# Altium PCB disp7segTester.PcbDoc
Units mil, origin at the board's own origin, x right, y up, seen from the top; angles counter-clockwise.
Board outline 5287.5 x 4575 mil, 2 copper layers (Top Layer, Bottom Layer), stack 65.792 mil thick; 116 components, 181 nets, 477 pads, 0 vias.
Unrouted connection lines stored in the file: 243.
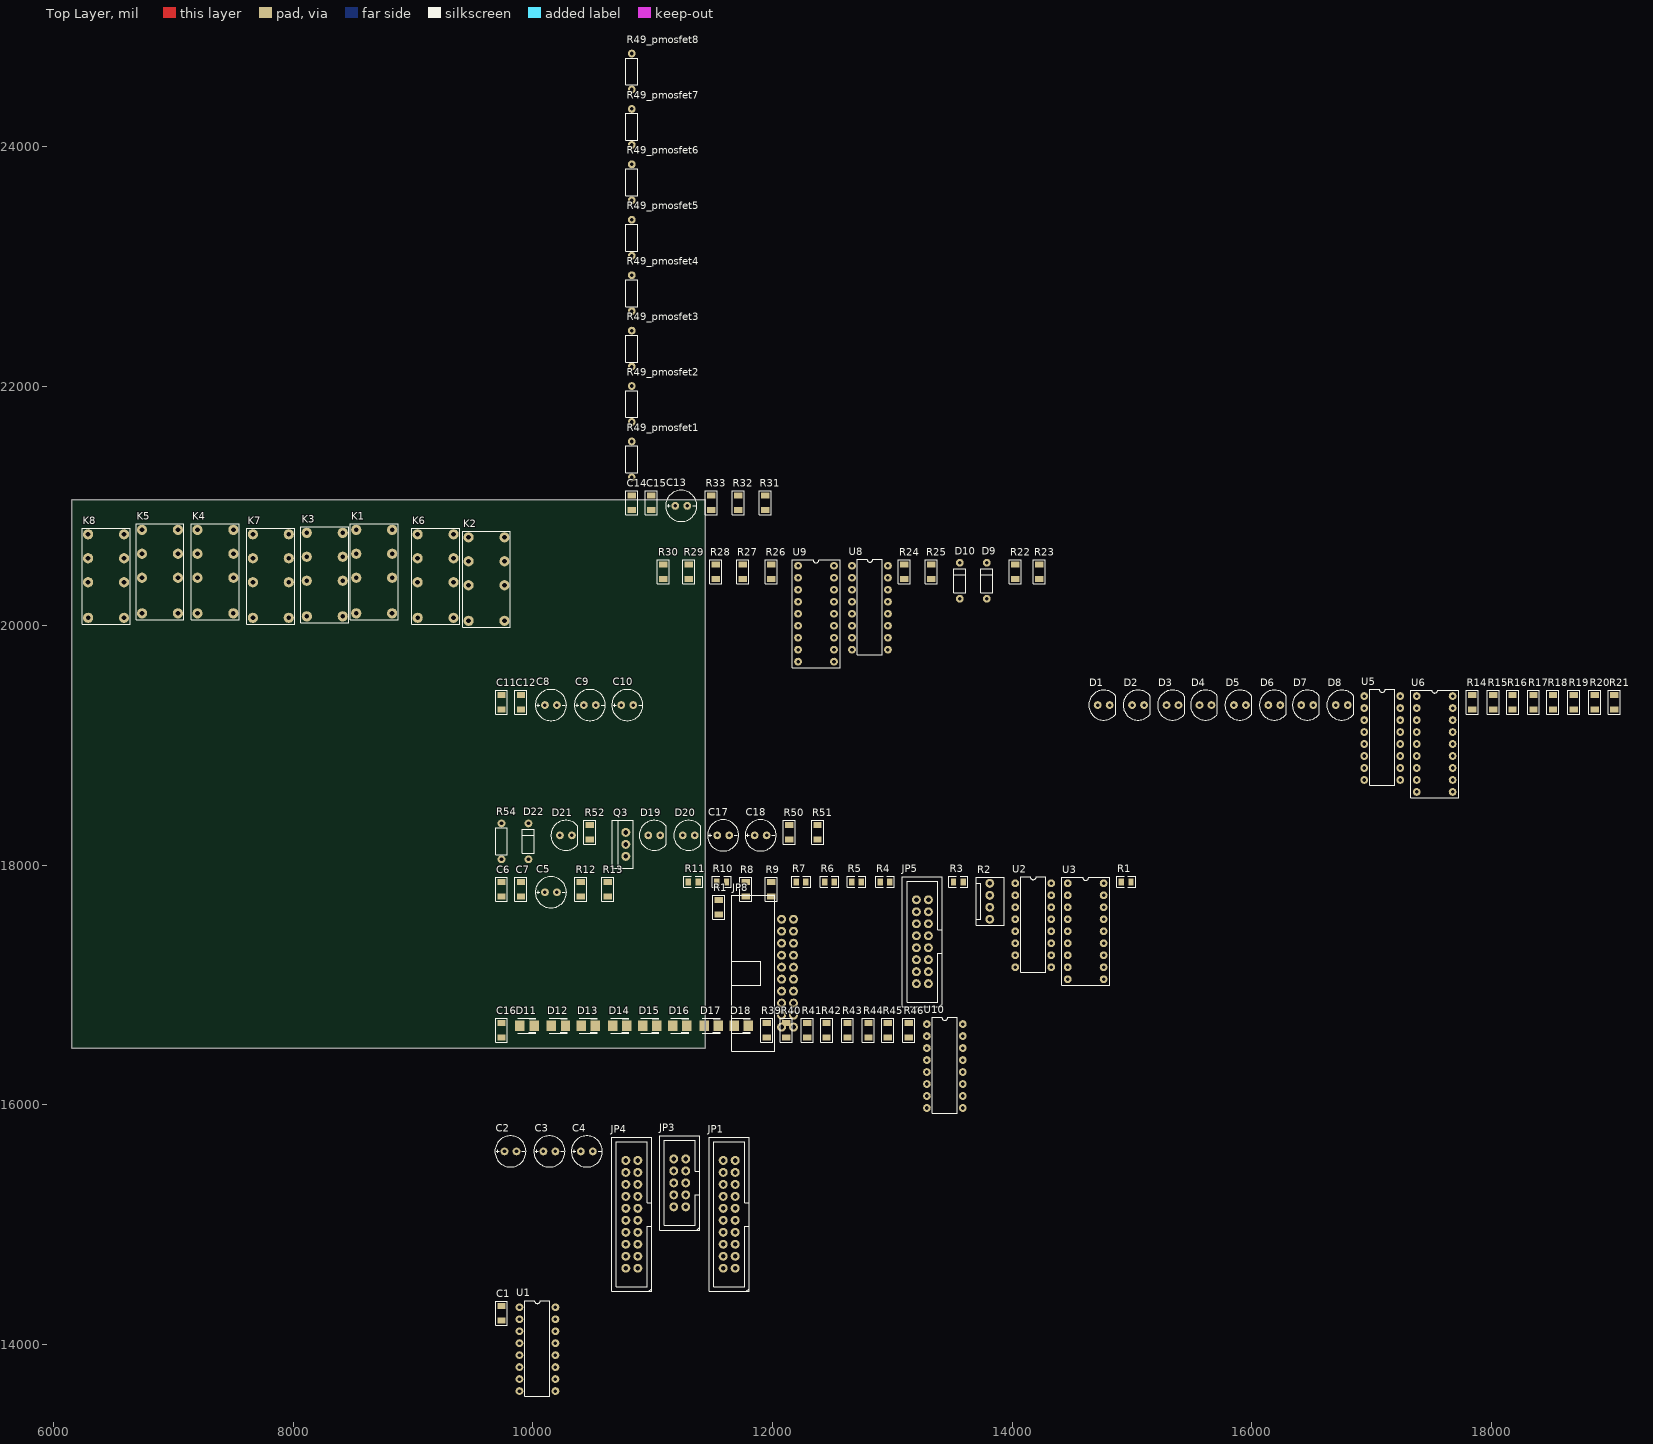
[diagram p0: Top Layer view]
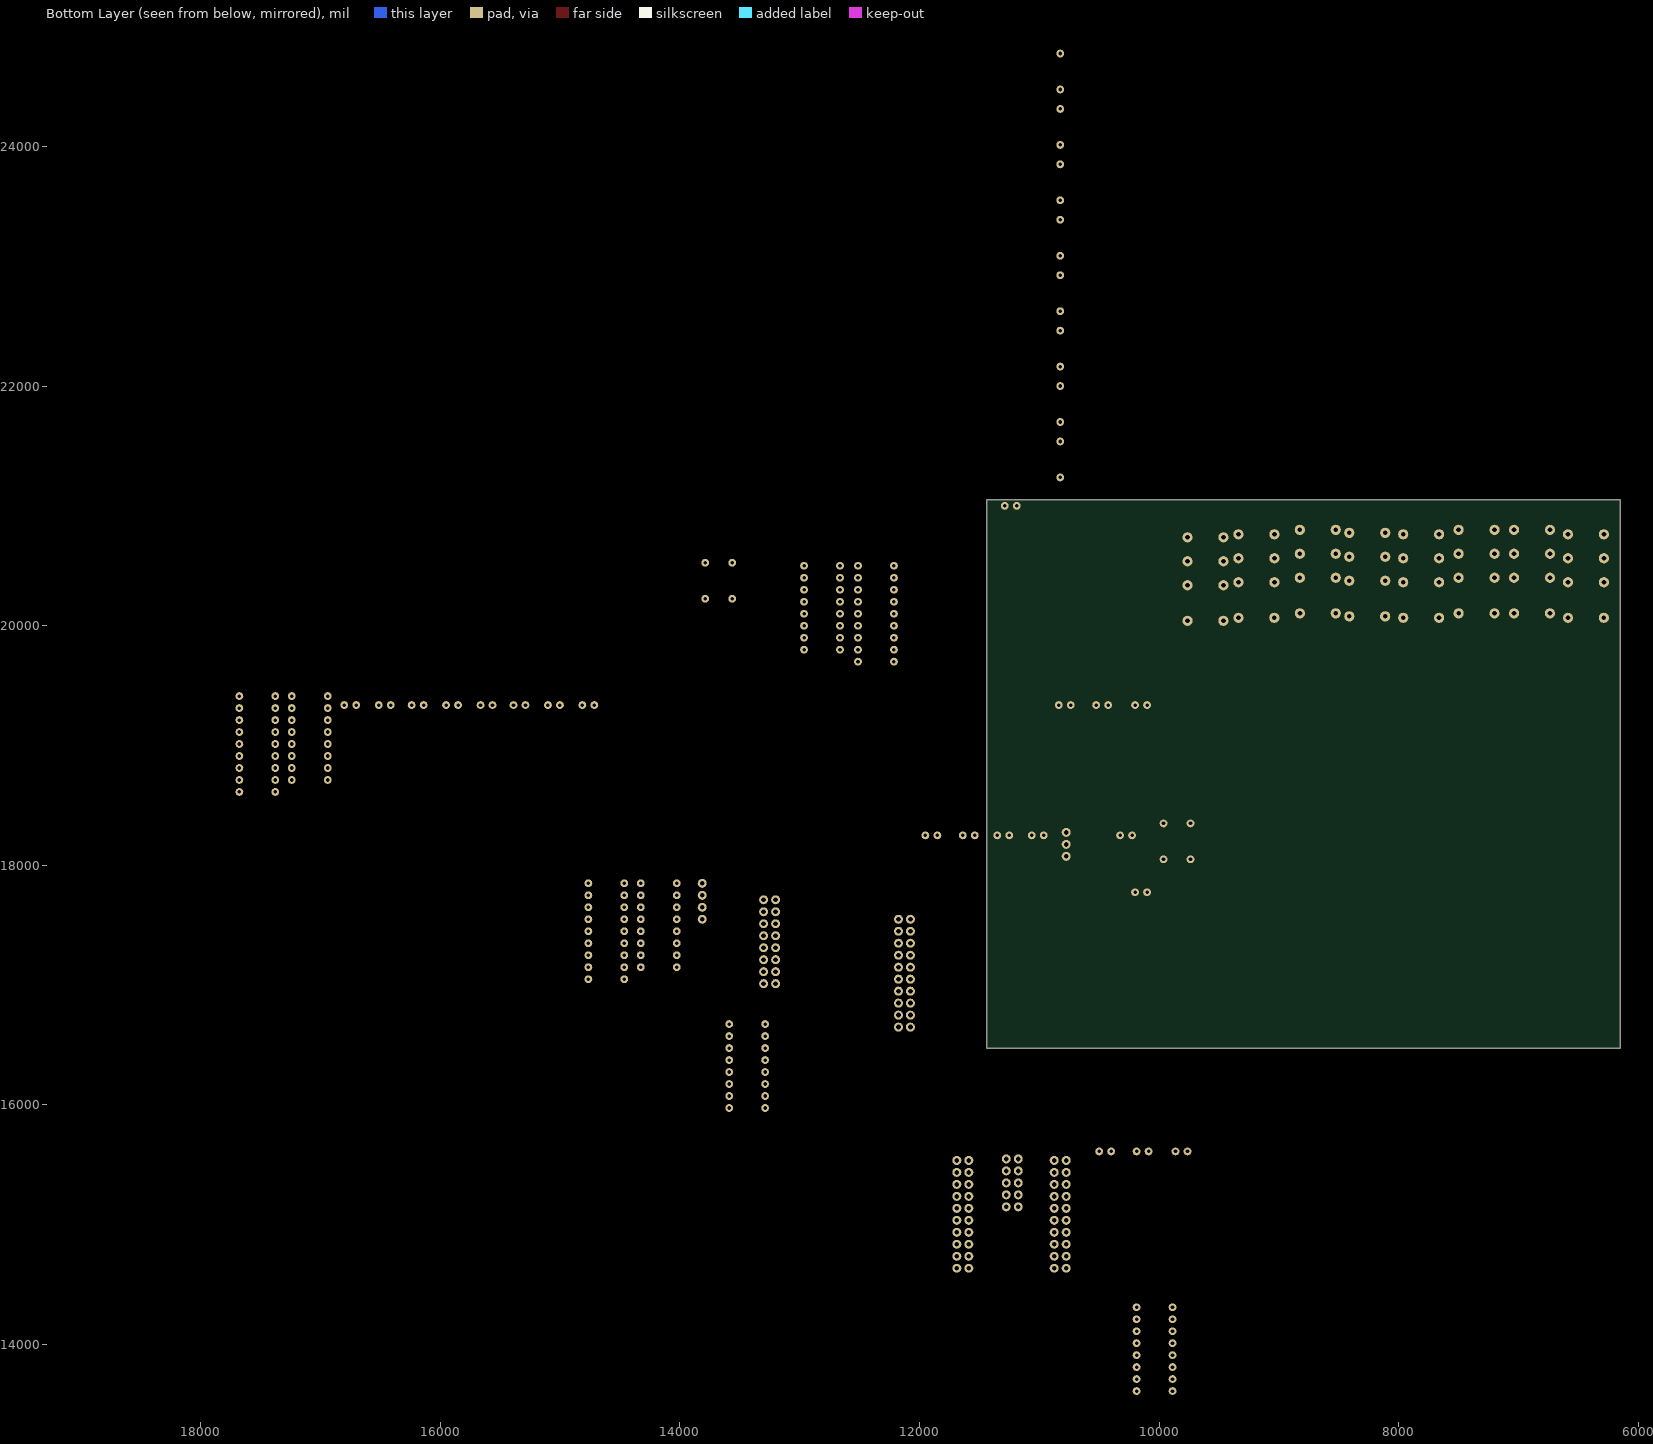
[diagram p1: Bottom Layer view, seen from below]

## Layer stack, top to bottom
Top Layer: signal copper 1.4
Dielectric: core 62.9921, FR-4, Dk 4.8
Bottom Layer: signal copper 1.4

## Board outline
6150,16475 11437.5,16475 11437.5,21050 6150,21050

## Design rules (kind name [scope] priority, off if disabled: settings)
Clearance [All] p1: gap=25
PolygonConnect [All] p1: connectstyle=Relief reliefconductorwidth=20 reliefentries=4 polygonreliefangle="90 Angle"
RoutingVias [All] p1: holewidth=28 width=50 viastyle="Through Hole" minholewidth=28 minwidth=50 maxholewidth=28 maxwidth=50
SilkscreenOverComponentPads [All] p1: minsilkscreentomaskgap=10
SolderMaskExpansion [All] p1: expansion=4
Width [All] p1: maxlimit=100 minlimit=10 preferedwidth=20
27 further rules are at their usual default settings.

## Classes and differential pairs
component class powerSupply: C17 C18 D19 D20 D21 D22 Q3 Q4 R50 R51 R52 R53 R54 U11
component class pmosfet8: Q1_pmosfet8 Q2_pmosfet8 R47_pmosfet8 R48_pmosfet8 R49_pmosfet8
component class pmosfet7: Q1_pmosfet7 Q2_pmosfet7 R47_pmosfet7 R48_pmosfet7 R49_pmosfet7
component class pmosfet6: Q1_pmosfet6 Q2_pmosfet6 R47_pmosfet6 R48_pmosfet6 R49_pmosfet6
component class pmosfet5: Q1_pmosfet5 Q2_pmosfet5 R47_pmosfet5 R48_pmosfet5 R49_pmosfet5
component class pmosfet4: Q1_pmosfet4 Q2_pmosfet4 R47_pmosfet4 R48_pmosfet4 R49_pmosfet4
component class pmosfet3: Q1_pmosfet3 Q2_pmosfet3 R47_pmosfet3 R48_pmosfet3 R49_pmosfet3
component class pmosfet2: Q1_pmosfet2 Q2_pmosfet2 R47_pmosfet2 R48_pmosfet2 R49_pmosfet2
component class pmosfet1: Q1_pmosfet1 Q2_pmosfet1 R47_pmosfet1 R48_pmosfet1 R49_pmosfet1
component class freePort: C16 D11 D12 D13 D14 D15 D16 D17 D18 R39 R40 R41 R42 R43 R44 R45 R46 U10
component class extra: JP6 JP7 LS1 R34 R35 R36 R37 R38 SW1
component class disp7segTester: C2 C3 C4 H1 H2 H3 H4 JP1 JP2 JP3 JP4 JP8 JP9 JP10 R1
component class anodes: C1 U1
component class ldr: C5 C6 C7 JP5 R1 R2 R3 R4 R5 R6 R7 R8 R9 R10 R11 R12 R13 U2 U3 U7
component class segments: C13 C14 C15 D9 D10 R22 R23 R24 R25 R26 R27 R28 R29 R30 R31 R32 R33 U7 U8 U9
net class ADRV[1..8]: ADRV1 ADRV2 ADRV3 ADRV4 ADRV5 ADRV6 ADRV7 ADRV8
net class AN[1..8]: AN0 AN1 AN2 AN3 AN4 AN5 AN6 AN7 AN8
channel class pmosfet: pmosfet1 pmosfet2 pmosfet3 pmosfet4 pmosfet5 pmosfet6 pmosfet7 pmosfet8
component class relayNetwork: C8 C9 C10 C11 C12 D1 D2 D3 D4 D5 D6 D7 D8 K1 K2 K3 K4 K5 K6 K7 K8 R14 R15 R16 R17 R18 R19 R20 R21 U5 U6

## Components (designator, comment, footprint, x,y, rotation, side; value= is the part's Value field where it differs from the comment)
C1 "Cap" c1206 9737.5,14262.5 r90 top
C2 "Cap Pol" C_EL_6-3X11 9812.5,15612.5 r0 top
C3 "Cap Pol" C_EL_6-3X11 10137.5,15612.5 r0 top
C4 "Cap Pol" C_EL_6-3X11 10450,15612.5 r0 top
C5 "Cap Pol" C_EL_6-3X11 10150,17775 r0 top
C6 "Cap" c1206 9737.5,17800 r90 top
C7 "Cap" c1206 9900,17800 r90 top
C8 "Cap Pol" C_EL_6-3X11 10150,19337.5 r0 top
C9 "Cap Pol" C_EL_6-3X11 10475,19337.5 r0 top
C10 "Cap Pol" C_EL_6-3X11 10787.5,19337.5 r0 top
C11 "Cap" c1206 9737.5,19362.5 r90 top
C12 "Cap" c1206 9900,19362.5 r90 top
C13 "Cap Pol" C_EL_6-3X11 11237.5,21000 r0 top
C14 "Cap" c1206 10825,21025 r90 top
C15 "Cap" c1206 10987.5,21025 r90 top
C16 "Cap" c1206 9737.5,16625 r90 top
C17 "Cap Pol" C_EL_6-3X11 11587.5,18250 r0 top
C18 "Cap Pol" C_EL_6-3X11 11900,18250 r0 top
D1 "Led 5mm Rojo Difuso" "LED5mm ROJO" 14762.5,19337.5 r0 top
D2 "Led 5mm Rojo Difuso" "LED5mm ROJO" 15050,19337.5 r0 top
D3 "Led 5mm Rojo Difuso" "LED5mm ROJO" 15337.5,19337.5 r0 top
D4 "Led 5mm Rojo Difuso" "LED5mm ROJO" 15612.5,19337.5 r0 top
D5 "Led 5mm Rojo Difuso" "LED5mm ROJO" 15900,19337.5 r0 top
D6 "Led 5mm Rojo Difuso" "LED5mm ROJO" 16187.5,19337.5 r0 top
D7 "Led 5mm Rojo Difuso" "LED5mm ROJO" 16462.5,19337.5 r0 top
D8 "Led 5mm Rojo Difuso" "LED5mm ROJO" 16750,19337.5 r0 top
D9 "Zener" D_SOD27 13787.5,20375 r90 top
D10 "Zener" D_SOD27 13562.5,20375 r90 top
D11 "LED" 3528 9950,16662.5 r0 top
D12 "LED" 3528 10212.5,16662.5 r0 top
D13 "LED" 3528 10462.5,16662.5 r0 top
D14 "LED" 3528 10725,16662.5 r0 top
D15 "LED" 3528 10975,16662.5 r0 top
D16 "LED" 3528 11225,16662.5 r0 top
D17 "LED" 3528 11487.5,16662.5 r0 top
D18 "LED" 3528 11737.5,16662.5 r0 top
D19 "Led 5mm Rojo Difuso" "LED5mm ROJO" 11012.5,18250 r0 top
D20 "Led 5mm Rojo Difuso" "LED5mm ROJO" 11300,18250 r0 top
D21 "Led 5mm Rojo Difuso" "LED5mm ROJO" 10275,18250 r0 top
D22 "Zener" D_SOD27 9962.5,18200 r90 top
JP1 "IDC 10x2" idc10x2 11637.5,15087.5 r90 top
JP3 "IDC 5x2" idc5x2 11225,15350 r90 top
JP4 "IDC 10x2" idc10x2 10825,15087.5 r90 top
JP5 "IDC 8x2" idc8x2 13300,17012.5 r90 top
JP8 "IDC 10x2 90deg" idc10x2_90 12175,16750 r90 top
K1 "RLY_2I_2A" relay4 8675,20300 r90 top
K2 "RLY_2I_2A" relay4 9612.5,20237.5 r90 top
K3 "RLY_2I_2A" relay4 8262.5,20275 r90 top
K4 "RLY_2I_2A" relay4 7350,20300 r90 top
K5 "RLY_2I_2A" relay4 6887.5,20300 r90 top
K6 "RLY_2I_2A" relay4 9187.5,20262.5 r90 top
K7 "RLY_2I_2A" relay4 7812.5,20262.5 r90 top
K8 "RLY_2I_2A" relay4 6437.5,20262.5 r90 top
Q3 "IRF9530" TO220 10775,18175 r90 top
R1 "Resistencia 1206; 0ohm" R1206 11550,17650 r90 top
R1 "LDR" 0805 14950,17862.5 r0 top
R2 "RVar" conpol4x1 13812.5,17600 r90 top
R3 "LDR" 0805 13550,17862.5 r0 top
R4 "LDR" 0805 12937.5,17862.5 r0 top
R5 "LDR" 0805 12700,17862.5 r0 top
R6 "LDR" 0805 12475,17862.5 r0 top
R7 "LDR" 0805 12237.5,17862.5 r0 top
R8 "Res" R1206 11775,17800 r90 top
R9 "Res" R1206 11987.5,17800 r90 top
R10 "LDR" 0805 11575,17862.5 r0 top
R11 "LDR" 0805 11337.5,17862.5 r0 top
R12 "Res" R1206 10400,17800 r90 top
R13 "Res" R1206 10625,17800 r90 top
R14 "Res" R1206 17837.5,19362.5 r90 top
R15 "Res" R1206 18012.5,19362.5 r90 top
R16 "Res" R1206 18175,19362.5 r90 top
R17 "Res" R1206 18350,19362.5 r90 top
R18 "Res" R1206 18512.5,19362.5 r90 top
R19 "Res" R1206 18687.5,19362.5 r90 top
R20 "Res" R1206 18862.5,19362.5 r90 top
R21 "Res" R1206 19025,19362.5 r90 top
R22 "Res" R1206 14025,20450 r90 top
R23 "Res" R1206 14225,20450 r90 top
R24 "Res" R1206 13100,20450 r90 top
R25 "Res" R1206 13325,20450 r90 top
R26 "Res" R1206 11987.5,20450 r90 top
R27 "Res" R1206 11750,20450 r90 top
R28 "Res" R1206 11525,20450 r90 top
R29 "Res" R1206 11300,20450 r90 top
R30 "Res" R1206 11087.5,20450 r90 top
R31 "Res" R1206 11937.5,21025 r90 top
R32 "Res" R1206 11712.5,21025 r90 top
R33 "Res" R1206 11487.5,21025 r90 top
R39 "Res" R1206 11950,16625 r90 top
R40 "Res" R1206 12112.5,16625 r90 top
R41 "Res" R1206 12287.5,16625 r90 top
R42 "Res" R1206 12450,16625 r90 top
R43 "Res" R1206 12625,16625 r90 top
R44 "Res" R1206 12800,16625 r90 top
R45 "Res" R1206 12962.5,16625 r90 top
R46 "Res" R1206 13137.5,16625 r90 top
R49_pmosfet1 "Resistencia 1206; 1Kohm" res300th 10825,21387.5 r90 top (schematic designator R49)
R49_pmosfet2 "Resistencia 1206; 1Kohm" res300th 10825,21850 r90 top (schematic designator R49)
R49_pmosfet3 "Resistencia 1206; 1Kohm" res300th 10825,22312.5 r90 top (schematic designator R49)
R49_pmosfet4 "Resistencia 1206; 1Kohm" res300th 10825,22775 r90 top (schematic designator R49)
R49_pmosfet5 "Resistencia 1206; 1Kohm" res300th 10825,23237.5 r90 top (schematic designator R49)
R49_pmosfet6 "Resistencia 1206; 1Kohm" res300th 10825,23700 r90 top (schematic designator R49)
R49_pmosfet7 "Resistencia 1206; 1Kohm" res300th 10825,24162.5 r90 top (schematic designator R49)
R49_pmosfet8 "Resistencia 1206; 1Kohm" res300th 10825,24625 r90 top (schematic designator R49)
R50 "Res" R1206 12137.5,18275 r90 top
R51 "Res" R1206 12375,18275 r90 top
R52 "Res" R1206 10475,18275 r90 top
R54 "Resistencia 1206; 1Kohm" res300th 9737.5,18200 r90 top
U1 "74HC595" DIP16 9887.5,14312.5 r0 top
U2 "74HC595" DIP16 14025,17850 r0 top
U3 "ULN2803" DIP18Z 14462.5,17850 r0 top
U5 "74HC595" DIP16 16937.5,19412.5 r0 top
U6 "ULN2803" DIP18Z 17375,19412.5 r0 top
U8 "74HC595" DIP16 12662.5,20500 r0 top
U9 "ULN2803" DIP18Z 12212.5,20500 r0 top
U10 "74HC595" DIP16 13287.5,16675 r0 top

## Footprints (in the part's own frame and the unit in brackets; to place one, negate y for a bottom-side part, rotate by r counter-clockwise, add the part's x,y. Pads: shape width x height; smd on the part's side, far side on the other; paste and mask are expansions set on the pad)
0805 [mil]
  rect 45x59.05 smd: 1(-40.62,0) 2(40.62,0)
  silkscreen extent -79,-45 79,45
3528 [mm] "Body 3.5 x 2.8 mm (LxW typ)"
  rect 2x2.2 smd: 1(-1.5,0) 2(1.5,0)
  silkscreen extent -1.91,-1.59 1.91,1.59, body extent -1.75,-1.4 1.75,1.4, height 1.9
c1206 [mil]
  rect 50x70 smd: 1(-60,0) 2(60,0)
  silkscreen extent -100,-50 100,50, body extent -63,-31 63,32, height 33
C_EL_6-3X11 [mil] "C_EL_6-3X11"
  round 65 hole 30: 1(-50,0) 2(50,0)
  silkscreen extent -130,-130 130,130, body extent -124,-124 124,124, height 433
conpol4x1 [mil] "CONECTOR POLARIZADO 4x1"
  round 75 hole 40: 1(-50,0) 2(50,0) 3(150,0) 4(250,0)
  silkscreen extent -100,-119 300,113, body extent -100,-117 300,113, height 460
D_SOD27 [mil] "DIODO THROUGH-HOLE"
  round 65 hole 30: 1(-150,0) 2(150,0)
  silkscreen extent -100,-50 100,50, body extent -162,-41 162,38, height 89
DIP16 [mil] "DIP16 IC"
  round 65 hole 30: 1(0,0) 2(0,-100) 3(0,-200) 4(0,-300) 5(0,-400) 6(0,-500) 7(0,-600) 8(0,-700) 9(300,-700) 10(300,-600) 11(300,-500) 12(300,-400) 13(300,-300) 14(300,-200) 15(300,-100) 16(300,0)
  silkscreen extent 46,-743 254,56, body extent -5,-738 305,50, height 201
DIP18Z [mil] "ZOCALO DIP18"
  round 65 hole 30: 1(0,0) 2(0,-100) 3(0,-200) 4(0,-300) 5(0,-400) 6(0,-500) 7(0,-600) 8(0,-700) 9(0,-800) 10(300,-800) 11(300,-700) 12(300,-600) 13(300,-500) 14(300,-400) 15(300,-300) 16(300,-200) 17(300,-100) 18(300,0)
  silkscreen extent -50,-850 350,50, body extent -47,-865 347,50, height 335
idc5x2 [mil]
  round 75 hole 40: 1(-200,-50) 2(-200,50) 3(-100,-50) 4(-100,50) 5(0,-50) 6(0,50) 7(100,-50) 8(100,50) 9(200,-50) 10(200,50)
  silkscreen extent -394,-167 394,167, body extent -400,-169 400,180, height 117
idc8x2 [mil]
  round 75 hole 40: 1(0,0) 2(0,100) 3(100,0) 4(100,100) 5(200,0) 6(200,100) 7(300,0) 8(300,100) 9(400,0) 10(400,100) 11(500,0) 12(500,100) 13(600,0) 14(600,100) 15(700,0) 16(700,100)
  silkscreen extent -194,-117 894,217, body extent -200,-117 900,231, height 351
idc10x2 [mil]
  round 75 hole 40: 1(-450,-50) 2(-450,50) 3(-350,-50) 4(-350,50) 5(-250,-50) 6(-250,50) 7(-150,-50) 8(-150,50) 9(-50,-50) 10(-50,50) 11(50,-50) 12(50,50) 13(150,-50) 14(150,50) 15(250,-50) 16(250,50) 17(350,-50) 18(350,50) 19(450,-50) 20(450,50)
  silkscreen extent -644,-167 644,167, body extent -650,-171 650,187, height 359
idc10x2_90 [mil]
  round 75 hole 40: 1(-100,0) 2(-100,100) 3(0,0) 4(0,100) 5(100,0) 6(100,100) 7(200,0) 8(200,100) 9(300,0) 10(300,100) 11(400,0) 12(400,100) 13(500,0) 14(500,100) 15(600,0) 16(600,100) 17(700,0) 18(700,100) 19(800,0) 20(800,100)
  silkscreen extent -300,158 1000,517, body extent -300,-22 1000,519, height 359
"LED5mm ROJO" [mil] "LED 5MM"
  round 65 hole 30: 1(-50,0) 2(50,0)
  silkscreen extent -125,-125 100,125, body extent -116,-116 99,116, height 339
R1206 [mil]
  rect 50x70 smd: 1(-60,0) 2(60,0)
  silkscreen extent -100,-50 100,50, body extent -63,-31 63,32, height 34
relay4 [mil]
  round 85 hole 40: 1(100,150) 2(300,150) 3(500,150) 4(-196.85,149.61) 5(-196.85,-149.61) 6(100,-150) 7(300,-150) 8(500,-150)
  silkscreen extent -250,-200 550,200, body extent -254,-199 554,199, height 453
res300th [mil] "RESISTENCIA THROUGH-HOLE"
  round 65 hole 30: 1(-150,0) 2(150,0)
  silkscreen extent -112,-50 112,50, body extent -159,-47 162,47, height 98
TO220 [mil] "DISPOSITIVO DE ENCAPSULADO TO-220"
  round 75 hole 40: 1(-100,0) 2(0,0) 3(100,0)
  silkscreen extent -200,-63 200,113, body extent -195,-63 195,113, height 769

## Part data
C1 C6 C7 C11 C12 C14 C15 C16: "Capacitor"
C2 C3 C4 C5 C8 C9 C10 C13: "Capacitor Electrolítico"
C17 C18: "Capacitor Polarizado"
D9 D10 D22: "Zener Diode"
D11 D12 D13 D14 D15 D16 D17 D18: "Led"
Q3: "100V  12A 0.3 ohm Power Field Effect Transistor"
R1 R3 R4 R5 R6 R7 R10 R11: "Resistor"
R2: "Resistencia Variable"
R8 R9 R12 R13 R14 R15 R16 R17 R18 R19 R20 R21 R22 R23 R24 R25 R26 R27 R28 R29 R30 R31 R32 R33 R39 R40 R41 R42 R43 R44 R45 R46 R50 R51 R52: "Resistencia"
U1 U2 U5 U8 U10: "8-Bit Shift Register with 3-State Output Registers"
U3 U6 U9: "Darlington Transistor Array"

## Nets (pads, with @x,y where several pads share a name; then routed paths per layer and width w, separated by ;. In a path a pad name is that pad's centre, name@x,y a point inside that pad or via, vN(x,y) a via of type N, cw(c..) or ccw(c..) an arc to the next point about the centre after c; other vN are vias at no path point)
1ST_SH_OUT: U1.9 U8.14
2ND_SH_OUT: U5.14 U8.9
3RD_SH_OUT: U2.14 U5.9
3V3: 
4TH_SH_OUT: U2.9 U10.14
5TH_SH_OUT: U10.9
5V: 
+5V: C1.2 C4.1 C6.2 C8.1 C11.2 C14.2 C16.2 C18.1 JP4.18 JP4.20 R2.2 R2.3 R12.2 R51.2 U1.16 U2.16 U3.10 U5.16 U8.16 U10.16
+12V: C2.1 C3.1 C5.1 C7.2 C9.1 C10.1 C12.2 C13.1 C15.2 C17.1 JP3.2 JP3.4 JP3.6 JP3.8 JP3.10 JP4.17 JP4.19 K7.5 K8.5 Q3.3 R14.2 R15.2 R16.2 R17.2 R18.2 R19.2 R20.2 R21.2 R50.2 U6.10 U9.10
A: R26.1
AD0: 
AD1: 
AD2: 
AD3: 
AD4: 
AD5: 
ADRV1: R49_pmosfet1.1 U1.15
ADRV2: R49_pmosfet2.1 U1.1
ADRV3: R49_pmosfet3.1 U1.2
ADRV4: R49_pmosfet4.1 U1.3
ADRV5: R49_pmosfet5.1 U1.4
ADRV6: R49_pmosfet6.1 U1.5
ADRV7: R49_pmosfet7.1 U1.6
ADRV8: R49_pmosfet8.1 U1.7
AN0: 
AN1: 
AN2: 
AN3: 
AN4: 
AN5: 
AN6: 
AN7: 
AN_ENABLE: JP1.4 R54.1
AN_OUT_CLK: JP1.20 U1.12
ANVDD_pmosfet1: 
ANVDD_pmosfet2: 
ANVDD_pmosfet3: 
ANVDD_pmosfet4: 
ANVDD_pmosfet5: 
ANVDD_pmosfet6: 
ANVDD_pmosfet7: 
ANVDD_pmosfet8: 
AREF: JP8.6
B: K1.3 R27.1
C: K5.3 R33.1
D: K4.8 R32.1
DP: R31.1
E: K3.3 R30.1
EARTH: 
F: R28.1
FP1: JP4.16 R39.2 U10.15
FP2: JP4.14 R40.2 U10.1
FP3: JP4.12 R41.2 U10.2
FP4: JP4.10 R42.2 U10.3
FP5: JP4.8 R43.2 U10.4
FP6: JP4.6 R44.2 U10.5
FP7: JP4.4 R45.2 U10.6
FP8: JP4.2 R46.2 U10.7
FP_OUT_CLK: JP1.2 U10.12
G: K2.8 R29.1
GND: C1.1 C2.2 C3.2 C4.2 C5.2 C6.1 C7.1 C8.2 C9.2 C10.2 C11.1 C12.1 C13.2 C14.1 C15.1 C16.1 C17.2 C18.2 D9.1 D10.1 D11.2 D12.2 D13.2 D14.2 D15.2 D16.2 D17.2 D18.2 D19.2 D20.2 D22.1 JP1.1 JP1.3 JP1.5 JP1.7 JP1.9 JP1.11 JP1.13 JP1.15 JP1.17 JP1.19 JP3.1 JP3.3 JP3.5 JP3.7 JP3.9 JP4.1 JP4.3 JP4.5 JP4.7 JP4.9 JP4.11 JP4.13 JP4.15 R1.1@11550,17590 R13.1 R25.1 U1.8 U1.13 U2.8 U2.13 U3.9 U5.8 U5.13 U6.9 U8.8 U8.13 U9.9 U10.8 U10.13
GND_IO: JP8.5
IO0: JP8.19
IO1: JP8.20
IO2: JP8.17
IO3~: JP8.18
IO4: JP8.15
IO5~: JP8.16
IO6~: JP8.13
IO7: JP8.14
IO8: JP8.11
IO9~: JP8.12
IO10~: JP8.9
IO11~: JP8.10
IO12: JP8.7
IO13: JP8.8
IOREF: JP8.1
ISENSE: R23.1
LDR_OUT_CLK: JP1.8 U2.12
LDRSENSE: JP1.6 R9.1
NetD1_1: D1.1 R14.1
NetD1_2: D1.2 U6.18
NetD2_1: D2.1 R15.1
NetD2_2: D2.2 U6.17
NetD3_1: D3.1 R16.1
NetD3_2: D3.2 K7.4 U6.16
NetD4_1: D4.1 R17.1
NetD4_2: D4.2 U6.15
NetD5_1: D5.1 R18.1
NetD5_2: D5.2 U6.14
NetD6_1: D6.1 R19.1
NetD6_2: D6.2 K8.4 U6.13
NetD7_1: D7.1 R20.1
NetD7_2: D7.2 U6.12
NetD8_1: D8.1 R21.1
NetD8_2: D8.2 U6.11
NetD9_2: D9.2 K1.1 K1.6 K2.6 K3.1 K4.6 K5.1 R22.2
NetD10_2: D10.2 R24.2
NetD11_1: D11.1 R39.1
NetD12_1: D12.1 R40.1
NetD13_1: D13.1 R41.1
NetD14_1: D14.1 R42.1
NetD15_1: D15.1 R43.1
NetD16_1: D16.1 R44.1
NetD17_1: D17.1 R45.1
NetD18_1: D18.1 R46.1
NetD19_1: D19.1 R50.1
NetD20_1: D20.1 R51.1
NetD21_1: D21.1 R52.1
NetD21_2: D21.2 D22.2
NetJP5_1: JP5.1 U3.18
NetJP5_2: JP5.2 JP5.4 JP5.6 JP5.8 JP5.10 JP5.12 JP5.14 JP5.16 R2.1 R8.2
NetJP5_3: JP5.3 U3.17
NetJP5_5: JP5.5 U3.16
NetJP5_7: JP5.7 U3.15
NetJP5_9: JP5.9 U3.14
NetJP5_11: JP5.11 U3.13
NetJP5_13: JP5.13 U3.12
NetJP5_15: JP5.15 U3.11
NetJP10_4: R1.2@11550,17710
NetK1_8: K1.8 R26.2 U9.18
NetK2_1: K2.1 K3.6 K4.1 K5.6
NetK2_3: K2.3 R27.2 U9.17
NetK3_8: K3.8 R29.2 U9.15
NetK4_3: K4.3 R30.2 U9.14
NetK5_8: K5.8 R32.2 U9.12
NetQ1_pmosfet1_1: R49_pmosfet1.2
NetQ1_pmosfet1_3: 
NetQ1_pmosfet2_1: R49_pmosfet2.2
NetQ1_pmosfet2_3: 
NetQ1_pmosfet3_1: R49_pmosfet3.2
NetQ1_pmosfet3_3: 
NetQ1_pmosfet4_1: R49_pmosfet4.2
NetQ1_pmosfet4_3: 
NetQ1_pmosfet5_1: R49_pmosfet5.2
NetQ1_pmosfet5_3: 
NetQ1_pmosfet6_1: R49_pmosfet6.2
NetQ1_pmosfet6_3: 
NetQ1_pmosfet7_1: R49_pmosfet7.2
NetQ1_pmosfet7_3: 
NetQ1_pmosfet8_1: R49_pmosfet8.2
NetQ1_pmosfet8_3: 
NetQ2_pmosfet1_1: 
NetQ2_pmosfet2_1: 
NetQ2_pmosfet3_1: 
NetQ2_pmosfet4_1: 
NetQ2_pmosfet5_1: 
NetQ2_pmosfet6_1: 
NetQ2_pmosfet7_1: 
NetQ2_pmosfet8_1: 
NetQ3_1: Q3.1
NetQ4_1: R54.2
NetR8_1: R8.1 R9.2
NetR12_1: R12.1 R13.2
NetR22_1: R22.1 R23.2
NetR24_1: R24.1 R25.2
NetR28_2: R28.2 U9.16
NetR31_2: R31.2 U9.13
NetR33_2: R33.2 U9.11
NetR38_1: 
PIN15: 
PIN16: 
PIN17: 
PIN18: 
PUL0: 
PUL1: 
PUL2: 
RE3: 
RESET: JP8.2
RLY_OUT_CLK: JP1.12 U5.12
SCL: JP8.4
SDA: JP8.3
SEG_OUT_CLK: JP1.10 U8.12
SH_CLK: U2.11
SH_RST: U2.10
SHIFT_CLK: JP1.16 U1.11 U5.11 U8.11 U10.11
SHIFT_DIN: JP1.14 U1.14
SHIFT_RST: JP1.18 U1.10 U5.10 U8.10 U10.10
VCC: 
VDD: Q3.2 R52.2
VIN: 
pads on no net: K1.2 K1.4 K1.5 K1.7 K2.2 K2.4 K2.5 K2.7 K3.2 K3.4 K3.5 K3.7 K4.2 K4.4 K4.5 K4.7 K5.2 K5.4 K5.5 K5.7 K6.1 K6.2 K6.3 K6.4 K6.5 K6.6 K6.7 K6.8 K7.1 K7.2 K7.3 K7.6 K7.7 K7.8 K8.1 K8.2 K8.3 K8.6 K8.7 K8.8 R1.1@14909.38,17862.5 R1.2@14990.62,17862.5 R2.4 R3.1 R3.2 R4.1 R4.2 R5.1 R5.2 R6.1 R6.2 R7.1 R7.2 R10.1 R10.2 R11.1 R11.2 U2.1 U2.2 U2.3 U2.4 U2.5 U2.6 U2.7 U2.15 U3.1 U3.2 U3.3 U3.4 U3.5 U3.6 U3.7 U3.8 U5.1 U5.2 U5.3 U5.4 U5.5 U5.6 U5.7 U5.15 U6.1 U6.2 U6.3 U6.4 U6.5 U6.6 U6.7 U6.8 U8.1 U8.2 U8.3 U8.4 U8.5 U8.6 U8.7 U8.15 U9.1 U9.2 U9.3 U9.4 U9.5 U9.6 U9.7 U9.8

## Dimensions
6150,16475 to 11437.5,16475 on Top Overlay
6150,16475 to 6150,21050 on Top Overlay